# EAGLE board 13533-LilyMini_Protosnap-panel.v10 (EAGLE 7.5.0), part 1 of 2
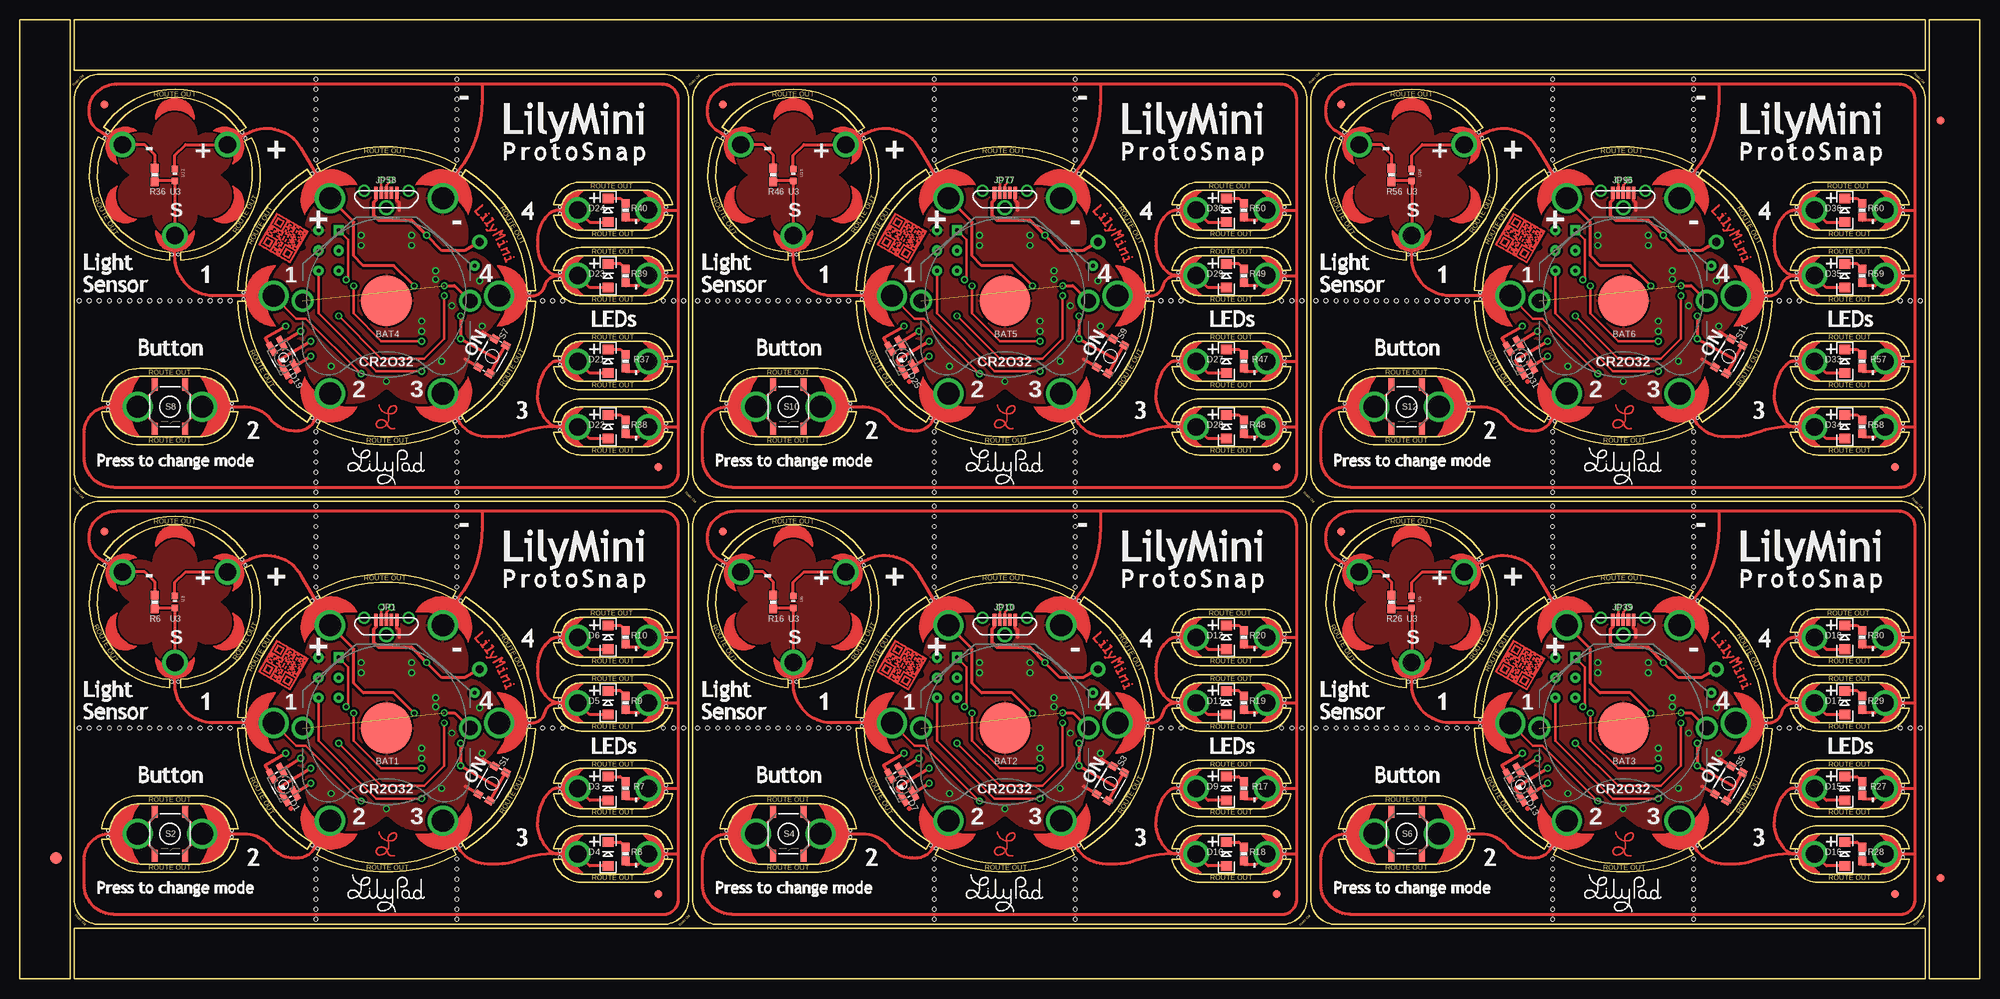
[diagram p0: board, top side]
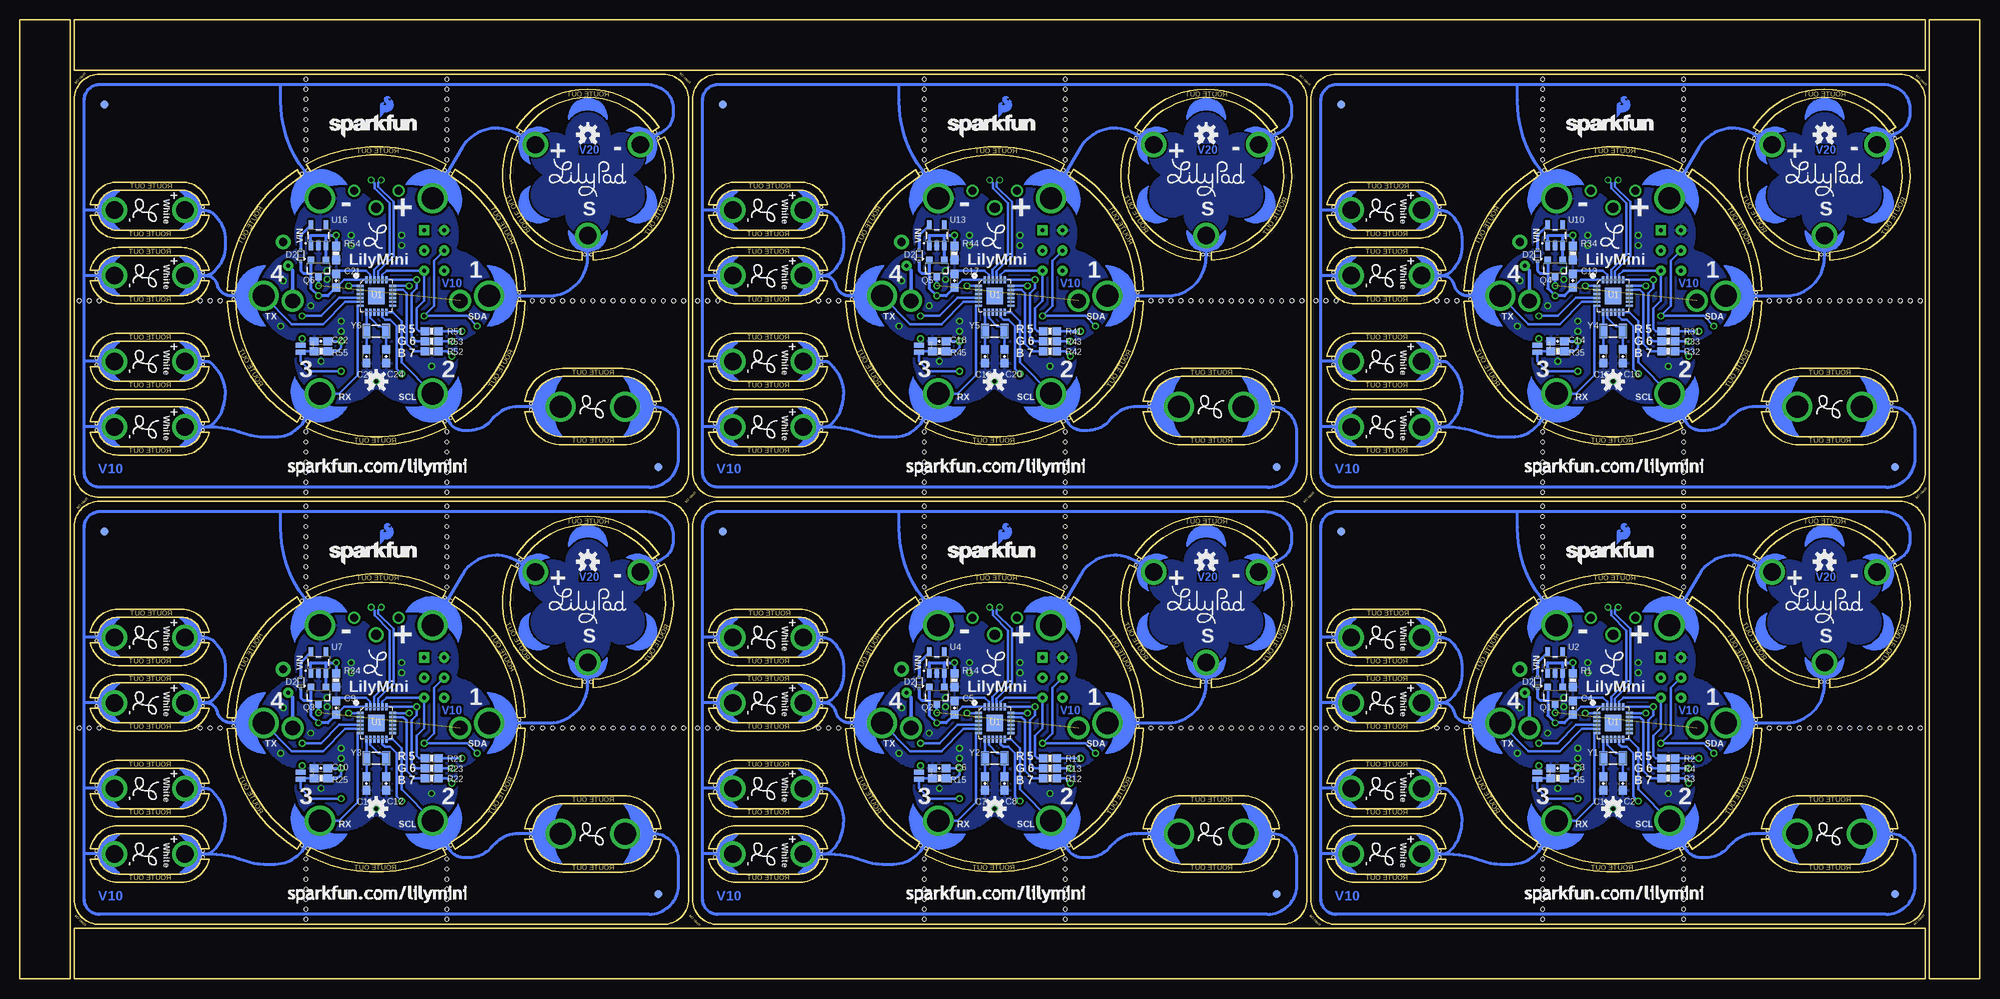
[diagram p1: board, bottom side, seen from below]

Size 247.14 x 120.9 mm. Coordinates in mm from the lower left corner, seen from the top.
Outline: 768 segments
Copper layers (1*16): Top 0.035mm / dielectric 1.5mm / Bottom 0.035mm
Design rules "SparkFun-2-layer-TIGHT *": minimum track width 7mil, minimum drill 15mil, track to track 7mil, track to pad 7mil, pad to pad 7mil, via to via 7mil, smd to smd 7mil, copper to edge 7mil, drill to drill 7mil, minimum pad ring 7mil, minimum via ring 7mil, stop-mask expansion 4mil, vias tented up to drill 25mil, thermal gap 10mil
Net classes: 1 USB: width 0.305 mm, drill 0.508 mm, clearance 0.195 mm
Holes 0.38 mm at 19.98,37.47 19.13,37.47 28.03,52.88 28.45,52.14 10.66,52.14 11.09,52.88 64.26,32.67 64.26,31.84 54.88,48.08 55.6,47.66 36.85,47.66 37.57,48.08 28.2,31.84 28.2,32.67 37.57,16.44 36.85,16.85 55.6,16.85 54.88,16.44 11.11,17.88 11.11,18.69 26.74,17.88 26.74,18.69 68.1,42.65 68.1,43.46 81.51,42.65 81.51,43.46 68.1,34.39 68.1,35.2 81.51,34.39 81.51,35.2 68.1,23.6 68.1,24.41 81.51,23.6 81.51,24.41 68.1,15.34 68.1,16.15 81.51,15.34 81.51,16.15 97.96,37.47 97.11,37.47 106.01,52.88 106.43,52.14 88.64,52.14 89.07,52.88 142.24,32.67 142.24,31.84 132.86,48.08 133.58,47.66 114.83,47.66 115.55,48.08 106.18,31.84 106.18,32.67 115.55,16.44 114.83,16.85 133.58,16.85 132.86,16.44 89.08,17.88 89.08,18.69 104.72,17.88 104.72,18.69 146.07,42.65 146.07,43.46 159.49,42.65 159.49,43.46 146.07,34.39 146.07,35.2 159.49,34.39 159.49,35.2 146.07,23.6 146.07,24.41 159.49,23.6 159.49,24.41 146.07,15.34 146.07,16.15 159.49,15.34 159.49,16.15 175.94,37.47 175.09,37.47 183.98,52.88 184.41,52.14 166.62,52.14 167.04,52.88 220.21,32.67 220.21,31.84 210.84,48.08 211.56,47.66 192.81,47.66 193.53,48.08 184.15,31.84 184.15,32.67 193.53,16.44 192.81,16.85 211.56,16.85 210.84,16.44 167.06,17.88 167.06,18.69 182.7,17.88 182.7,18.69 224.05,42.65 224.05,43.46 237.47,42.65 237.47,43.46 224.05,34.39 224.05,35.2 237.47,34.39 237.47,35.2 224.05,23.6 224.05,24.41 237.47,23.6 237.47,24.41 224.05,15.34 224.05,16.15 237.47,15.34 237.47,16.15 19.98,91.32 19.13,91.32 28.03,106.73 28.45,105.99 10.66,105.99 11.09,106.73 64.26,86.52 64.26,85.69 54.88,101.93 55.6,101.51 36.85,101.51 37.57,101.93 28.2,85.69 28.2,86.52 37.57,70.28 36.85,70.7 55.6,70.7 54.88,70.28 11.11,71.73 11.11,72.54 26.74,71.73 26.74,72.54 68.1,96.49 68.1,97.31 81.51,96.49 81.51,97.31 68.1,88.24 68.1,89.05 81.51,88.24 81.51,89.05 68.1,77.44 68.1,78.26 81.51,77.44 81.51,78.26 68.1,69.19 68.1,70 81.51,69.19 81.51,70 97.96,91.32 97.11,91.32 106.01,106.73 106.43,105.99 88.64,105.99 89.07,106.73 142.24,86.52 142.24,85.69 132.86,101.93 133.58,101.51 114.83,101.51 115.55,101.93 106.18,85.69 106.18,86.52 115.55,70.28 114.83,70.7 133.58,70.7 132.86,70.28 89.08,71.73 89.08,72.54 104.72,71.73 104.72,72.54 146.07,96.49 146.07,97.31 159.49,96.49 159.49,97.31 146.07,88.24 146.07,89.05 159.49,88.24 159.49,89.05 146.07,77.44 146.07,78.26 159.49,77.44 159.49,78.26 146.07,69.19 146.07,70 159.49,69.19 159.49,70 175.94,91.32 175.09,91.32 183.98,106.73 184.41,105.99 166.62,105.99 167.04,106.73 220.21,86.52 220.21,85.69 210.84,101.93 211.56,101.51 192.81,101.51 193.53,101.93 184.15,85.69 184.15,86.52 193.53,70.28 192.81,70.7 211.56,70.7 210.84,70.28 167.06,71.73 167.06,72.54 182.7,71.73 182.7,72.54 224.05,96.49 224.05,97.31 237.47,96.49 237.47,97.31 224.05,88.24 224.05,89.05 237.47,88.24 237.47,89.05 224.05,77.44 224.05,78.26 237.47,77.44 237.47,78.26 224.05,69.19 224.05,70 237.47,69.19 237.47,70
Holes 0.51 mm at 26.54,31.62 25.27,31.62 24,31.62 22.73,31.62 21.46,31.62 20.19,31.62 18.92,31.62 17.65,31.62 16.38,31.62 15.11,31.62 13.84,31.62 12.57,31.62 11.3,31.62 10.03,31.62 8.76,31.62 7.49,31.62 65.91,31.62 67.18,31.62 68.45,31.62 81.15,31.62 82.42,31.62 83.69,31.62 37.34,15.11 37.34,13.84 37.34,12.57 37.34,11.3 37.34,10.03 37.34,8.76 37.34,7.49 55.12,15.11 55.12,13.84 55.12,12.57 55.12,11.3 55.12,10.03 55.12,8.76 55.12,7.49 37.34,49.4 37.34,50.67 37.34,51.94 37.34,53.21 37.34,54.48 37.34,55.75 37.34,57.02 37.34,58.29 37.34,59.56 55.12,49.4 55.12,50.67 55.12,51.94 55.12,53.21 55.12,54.48 55.12,55.75 55.12,57.02 55.12,58.29 55.12,59.56 104.52,31.62 103.25,31.62 101.98,31.62 100.71,31.62 99.44,31.62 98.17,31.62 96.9,31.62 95.63,31.62 94.36,31.62 93.09,31.62 91.82,31.62 90.55,31.62 89.28,31.62 88.01,31.62 86.74,31.62 85.47,31.62 143.89,31.62 145.16,31.62 146.43,31.62 159.13,31.62 160.4,31.62 161.67,31.62 115.32,15.11 115.32,13.84 115.32,12.57 115.32,11.3 115.32,10.03 115.32,8.76 115.32,7.49 133.1,15.11 133.1,13.84 133.1,12.57 133.1,11.3 133.1,10.03 133.1,8.76 133.1,7.49 115.32,49.4 115.32,50.67 115.32,51.94 115.32,53.21 115.32,54.48 115.32,55.75 115.32,57.02 115.32,58.29 115.32,59.56 133.1,49.4 133.1,50.67 133.1,51.94 133.1,53.21 133.1,54.48 133.1,55.75 133.1,57.02 133.1,58.29 133.1,59.56 182.5,31.62 181.23,31.62 179.96,31.62 178.69,31.62 177.42,31.62 176.15,31.62 174.88,31.62 173.61,31.62 172.34,31.62 171.07,31.62 169.8,31.62 168.53,31.62 167.26,31.62 165.99,31.62 164.72,31.62 163.45,31.62 221.87,31.62 223.14,31.62 224.41,31.62 237.11,31.62 238.38,31.62 239.65,31.62 193.29,15.11 193.29,13.84 193.29,12.57 193.29,11.3 193.29,10.03 193.29,8.76 193.29,7.49 211.07,15.11 211.07,13.84 211.07,12.57 211.07,11.3 211.07,10.03 211.07,8.76 211.07,7.49 193.29,49.4 193.29,50.67 193.29,51.94 193.29,53.21 193.29,54.48 193.29,55.75 193.29,57.02 193.29,58.29 193.29,59.56 211.07,49.4 211.07,50.67 211.07,51.94 211.07,53.21 211.07,54.48 211.07,55.75 211.07,57.02 211.07,58.29 211.07,59.56 26.54,85.47 25.27,85.47 24,85.47 22.73,85.47 21.46,85.47 20.19,85.47 18.92,85.47 17.65,85.47 16.38,85.47 15.11,85.47 13.84,85.47 12.57,85.47 11.3,85.47 10.03,85.47 8.76,85.47 7.49,85.47 65.91,85.47 67.18,85.47 68.45,85.47 81.15,85.47 82.42,85.47 83.69,85.47 37.34,68.96 37.34,67.69 37.34,66.42 37.34,65.15 37.34,63.88 37.34,62.61 37.34,61.34 55.12,68.96 55.12,67.69 55.12,66.42 55.12,65.15 55.12,63.88 55.12,62.61 55.12,61.34 37.34,103.25 37.34,104.52 37.34,105.79 37.34,107.06 37.34,108.33 37.34,109.6 37.34,110.87 37.34,112.14 37.34,113.41 55.12,103.25 55.12,104.52 55.12,105.79 55.12,107.06 55.12,108.33 55.12,109.6 55.12,110.87 55.12,112.14 55.12,113.41 104.52,85.47 103.25,85.47 101.98,85.47 100.71,85.47 99.44,85.47 98.17,85.47 96.9,85.47 95.63,85.47 94.36,85.47 93.09,85.47 91.82,85.47 90.55,85.47 89.28,85.47 88.01,85.47 86.74,85.47 85.47,85.47 143.89,85.47 145.16,85.47 146.43,85.47 159.13,85.47 160.4,85.47 161.67,85.47 115.32,68.96 115.32,67.69 115.32,66.42 115.32,65.15 115.32,63.88 115.32,62.61 115.32,61.34 133.1,68.96 133.1,67.69 133.1,66.42 133.1,65.15 133.1,63.88 133.1,62.61 133.1,61.34 115.32,103.25 115.32,104.52 115.32,105.79 115.32,107.06 115.32,108.33 115.32,109.6 115.32,110.87 115.32,112.14 115.32,113.41 133.1,103.25 133.1,104.52 133.1,105.79 133.1,107.06 133.1,108.33 133.1,109.6 133.1,110.87 133.1,112.14 133.1,113.41 182.5,85.47 181.23,85.47 179.96,85.47 178.69,85.47 177.42,85.47 176.15,85.47 174.88,85.47 173.61,85.47 172.34,85.47 171.07,85.47 169.8,85.47 168.53,85.47 167.26,85.47 165.99,85.47 164.72,85.47 163.45,85.47 221.87,85.47 223.14,85.47 224.41,85.47 237.11,85.47 238.38,85.47 239.65,85.47 193.29,68.96 193.29,67.69 193.29,66.42 193.29,65.15 193.29,63.88 193.29,62.61 193.29,61.34 211.07,68.96 211.07,67.69 211.07,66.42 211.07,65.15 211.07,63.88 211.07,62.61 211.07,61.34 193.29,103.25 193.29,104.52 193.29,105.79 193.29,107.06 193.29,108.33 193.29,109.6 193.29,110.87 193.29,112.14 193.29,113.41 211.07,103.25 211.07,104.52 211.07,105.79 211.07,107.06 211.07,108.33 211.07,109.6 211.07,110.87 211.07,112.14 211.07,113.41
tRestrict: area 27.8,22.9 to 35.7,41.6; area 30,13.6 to 46.2,26.2; area 46.2,13.6 to 62.4,26.2; area 56.8,22.9 to 64.6,41.6; area 30.3,36.4 to 36.4,42.6; area 14.2,37.3 to 24.9,42.4; area 22.5,38.4 to 29.9,47.5; area 22.5,47.5 to 29.9,56.6; area 14.2,52.6 to 24.6,57.7; area 8.9,47.5 to 16.6,56.6; area 8.9,38.4 to 16.6,47.5; area 46.2,38.4 to 62.4,50.8; 66 more areas
bRestrict: area 56.8,22.9 to 64.6,41.6; area 46.2,13.6 to 62.4,26.2; area 30,13.6 to 46.2,26.2; area 27.8,22.9 to 35.7,41.6; area 46.9,34.5 to 50.7,35.6; area 14.2,37.3 to 24.9,42.4; area 22.5,38.4 to 29.9,47.5; area 22.5,47.5 to 29.9,56.6; area 14.2,52.6 to 24.6,57.7; area 8.9,47.5 to 16.6,56.6; area 8.9,38.4 to 16.6,47.5; area 46.2,38.4 to 62.4,50.9; 66 more areas

## Footprints (pad centres in the part's own frame; a part is rotated, then mirrored left to right if it is on the bottom)
BATTERY_20MM_PTH_KIT = drill 1.854: +1 -10.554,0; +2 10.554,0 | smd 6.35 x 6.35: -3 0,0
0603-CAP = smd 1.1 x 1: 1 -0.85,0; 2 0.85,0
P-LCC-4-3 = smd 0.75 x 1.8: 1 0.725,1.7; 2 -0.725,1.7; 3 -0.725,-1.7; 4 0.725,-1.7
SOD-523 = smd 0.4 x 0.4: A -0.7,0; C 0.7,0
LED-1206 = smd 1.2 x 1.4: A -1.5,0; C 1.5,0
FIDUCIAL-1.5X3 = smd 1.5 x 1.5: 1 0,0
FIDUCIAL-1X2 = smd 1 x 1: 1 0,0
USB-B-MICRO-SMD_VERT = smd 0.45 x 1.5: D+ 0,0; D- -0.65,0; GND 1.3,0; ID 0.65,0; VBUS -1.3,0 | drill 1.016: P1 -2.8,0.25; P2 2.8,0.25 | drill 1.27: P3 0,-1.9
1X01NS = drill 1.016 pad 1.88: 1 0,0
1X01_POGOPIN_PAD_NOSILK_1SIDE_SQUARE = drill 0.508 pad 1.27 square: P$1 0,0
1X01_POGOPIN_PAD_NOSILK_1SIDE_ROUND = drill 0.508 pad 1.27: P$1 0,0
PETAL-MEDIUM-2SIDE = drill 2.794: 1 0,-0.254
PETAL-SMALL-2SIDE = drill 2.2: 1 0,0
SOT23-3 = smd 0.8 x 0.9: 1 -0.95,-1; 2 0.95,-1; 3 0,1.1
0603-RES = smd 1.1 x 1: 1 -0.85,0; 2 0.85,0
TACTILE_SWITCH_SMD_4.6X2.8MM = smd 0.9 x 1: 1 -2.05,-0.8; 2 2.05,-0.8; 3 2.05,0.8; 4 -2.05,0.8
TACTILE-SWITCH-SMD = smd 1.524 x 0.762: 1 -2.794,1.905; 2 2.794,1.905; 3 -2.794,-1.905; 4 2.794,-1.905
PAD-JUMPER-2-NO_NO_SILK = smd 0.635 x 1.27: 1 -0.45,0; 2 0.45,0
QFN-24_ALT2 = smd 0.9 x 0.3: 1 -2.05,1.25; 2 -2.05,0.75; 3 -2.05,0.25; 4 -2.05,-0.25; 5 -2.05,-0.75; 6 -2.05,-1.25; 13 2.05,-1.25; 14 2.05,-0.75; 15 2.05,-0.25; 16 2.05,0.25; 17 2.05,0.75; 18 2.05,1.25 | smd 0.3 x 0.9: 7 -1.25,-2.05; 8 -0.75,-2.05; 9 -0.25,-2.05; 10 0.25,-2.05; 11 0.75,-2.05; 12 1.25,-2.05; 19 1.25,2.05; 20 0.75,2.05; 21 0.25,2.05; 22 -0.25,2.05; 23 -0.75,2.05; 24 -1.25,2.05 | smd 2.1 x 2.1: EP 0,0
SOT23-5 = smd 0.55 x 1.2: 1 -0.95,-1.3; 2 0,-1.3; 3 0.95,-1.3; 4 0.95,1.3; 5 -0.95,1.3
ALS-PT19 = smd 0.8 x 0.8: C -0.75,0; E 0.75,0
CRYSTAL-SMD-3.2X1.5MM = smd 1 x 1.8: P$1 -1.25,0; P$2 1.25,0

## Placement (x,y rotation side)
$1_61_$_2016-09-25_21-56-01  OSHW-LOGOS  [OSHW-LOGO-S]  124.21,21.46 0 bottom
$1_61_$_2016-09-25_21-56-02  OSHW-LOGOS  [OSHW-LOGO-S]  202.18,21.46 0 bottom
$1_61_$_2016-09-25_21-56-03  OSHW-LOGOS  [OSHW-LOGO-S]  46.23,75.31 0 bottom
$1_61_$_2016-09-25_21-56-04  OSHW-LOGOS  [OSHW-LOGO-S]  124.21,75.31 0 bottom
$1_61_$_2016-09-25_21-56-05  OSHW-LOGOS  [OSHW-LOGO-S]  202.18,75.31 0 bottom
$1_61_$_2016-09-25_21-56-09  OSHW-LOGOS  [OSHW-LOGO-S]  46.23,21.46 0 bottom
BAT1  CR2032  [BATTERY_20MM_PTH_KIT]  46.23,31.62 180 top
BAT2  CR2032  [BATTERY_20MM_PTH_KIT]  124.21,31.62 180 top
BAT3  CR2032  [BATTERY_20MM_PTH_KIT]  202.18,31.62 180 top
BAT4  CR2032  [BATTERY_20MM_PTH_KIT]  46.23,85.47 180 top
BAT5  CR2032  [BATTERY_20MM_PTH_KIT]  124.21,85.47 180 top
BAT6  CR2032  [BATTERY_20MM_PTH_KIT]  202.18,85.47 180 top
C1  15pF  [0603-CAP]  47.48,24.64 90 bottom
C2  15pF  [0603-CAP]  44.98,24.64 90 bottom
C3  0.1uF  [0603-CAP]  53.21,26.54 180 bottom
C4  0.1uF  [0603-CAP]  51.31,34.16 90 bottom
C5  0.1uF  [0603-CAP]  129.29,34.16 90 bottom
C6  0.1uF  [0603-CAP]  131.19,26.54 180 bottom
C7  15pF  [0603-CAP]  125.46,24.64 90 bottom
C8  15pF  [0603-CAP]  122.96,24.64 90 bottom
C9  0.1uF  [0603-CAP]  207.26,34.16 90 bottom
C10  0.1uF  [0603-CAP]  209.17,26.54 180 bottom
C11  15pF  [0603-CAP]  203.43,24.64 90 bottom
C12  15pF  [0603-CAP]  200.93,24.64 90 bottom
C13  0.1uF  [0603-CAP]  51.31,88.01 90 bottom
C14  0.1uF  [0603-CAP]  53.21,80.39 180 bottom
C15  15pF  [0603-CAP]  47.48,78.49 90 bottom
C16  15pF  [0603-CAP]  44.98,78.49 90 bottom
C17  0.1uF  [0603-CAP]  129.29,88.01 90 bottom
C18  0.1uF  [0603-CAP]  131.19,80.39 180 bottom
C19  15pF  [0603-CAP]  125.46,78.49 90 bottom
C20  15pF  [0603-CAP]  122.96,78.49 90 bottom
C21  0.1uF  [0603-CAP]  207.26,88.01 90 bottom
C22  0.1uF  [0603-CAP]  209.17,80.39 180 bottom
C23  15pF  [0603-CAP]  203.43,78.49 90 bottom
C24  15pF  [0603-CAP]  200.93,78.49 90 bottom
D1  [P-LCC-4-3]  33.25,24.48 210 top
D2  RB751  [SOD-523]  55.75,37.34 270 bottom
D3  [LED-1206]  74.17,24 90 top
D4  [LED-1206]  74.17,15.75 90 top
D5  [LED-1206]  74.17,34.8 90 top
D6  [LED-1206]  74.17,43.05 90 top
D7  [P-LCC-4-3]  111.23,24.48 210 top
D8  RB751  [SOD-523]  133.73,37.34 270 bottom
D9  [LED-1206]  152.15,24 90 top
D10  [LED-1206]  152.15,15.75 90 top
D11  [LED-1206]  152.15,34.8 90 top
D12  [LED-1206]  152.15,43.05 90 top
D13  [P-LCC-4-3]  189.21,24.48 210 top
D14  RB751  [SOD-523]  211.71,37.34 270 bottom
D15  [LED-1206]  230.12,24 90 top
D16  [LED-1206]  230.12,15.75 90 top
D17  [LED-1206]  230.12,34.8 90 top
D18  [LED-1206]  230.12,43.05 90 top
D19  [P-LCC-4-3]  33.25,78.33 210 top
D20  RB751  [SOD-523]  55.75,91.19 270 bottom
D21  [LED-1206]  74.17,77.85 90 top
D22  [LED-1206]  74.17,69.6 90 top
D23  [LED-1206]  74.17,88.65 90 top
D24  [LED-1206]  74.17,96.9 90 top
D25  [P-LCC-4-3]  111.23,78.33 210 top
D26  RB751  [SOD-523]  133.73,91.19 270 bottom
D27  [LED-1206]  152.15,77.85 90 top
D28  [LED-1206]  152.15,69.6 90 top
D29  [LED-1206]  152.15,88.65 90 top
D30  [LED-1206]  152.15,96.9 90 top
D31  [P-LCC-4-3]  189.21,78.33 210 top
D32  RB751  [SOD-523]  211.71,91.19 270 bottom
D33  [LED-1206]  230.12,77.85 90 top
D34  [LED-1206]  230.12,69.6 90 top
D35  [LED-1206]  230.12,88.65 90 top
D36  [LED-1206]  230.12,96.9 90 top
E$1  [FIDUCIAL-1.5X3]  4.57,15.24 0 top
E$7  [FIDUCIAL-1X2]  242.19,108.2 180 top
E$8  [FIDUCIAL-1X2]  242.19,12.7 0 top
FD1  FIDUCIAL1X2  [FIDUCIAL-1X2]  10.67,56.39 0 top
FD2  FIDUCIAL1X2  [FIDUCIAL-1X2]  80.52,10.67 0 top
FD3  FIDUCIAL1X2  [FIDUCIAL-1X2]  80.52,56.39 0 bottom
FD4  FIDUCIAL1X2  [FIDUCIAL-1X2]  10.67,10.67 0 bottom
FD5  FIDUCIAL1X2  [FIDUCIAL-1X2]  158.5,10.67 0 top
FD6  FIDUCIAL1X2  [FIDUCIAL-1X2]  88.65,56.39 0 top
FD7  FIDUCIAL1X2  [FIDUCIAL-1X2]  158.5,56.39 0 bottom
FD8  FIDUCIAL1X2  [FIDUCIAL-1X2]  88.65,10.67 0 bottom
FD9  FIDUCIAL1X2  [FIDUCIAL-1X2]  236.47,10.67 0 top
FD10  FIDUCIAL1X2  [FIDUCIAL-1X2]  166.62,56.39 0 top
FD11  FIDUCIAL1X2  [FIDUCIAL-1X2]  236.47,56.39 0 bottom
FD12  FIDUCIAL1X2  [FIDUCIAL-1X2]  166.62,10.67 0 bottom
FD13  FIDUCIAL1X2  [FIDUCIAL-1X2]  80.52,64.52 0 top
FD14  FIDUCIAL1X2  [FIDUCIAL-1X2]  10.67,110.24 0 top
FD15  FIDUCIAL1X2  [FIDUCIAL-1X2]  80.52,110.24 0 bottom
FD16  FIDUCIAL1X2  [FIDUCIAL-1X2]  10.67,64.52 0 bottom
FD17  FIDUCIAL1X2  [FIDUCIAL-1X2]  158.5,64.52 0 top
FD18  FIDUCIAL1X2  [FIDUCIAL-1X2]  88.65,110.24 0 top
FD19  FIDUCIAL1X2  [FIDUCIAL-1X2]  158.5,110.24 0 bottom
FD20  FIDUCIAL1X2  [FIDUCIAL-1X2]  88.65,64.52 0 bottom
FD21  FIDUCIAL1X2  [FIDUCIAL-1X2]  236.47,64.52 0 top
FD22  FIDUCIAL1X2  [FIDUCIAL-1X2]  166.62,110.24 0 top
FD23  FIDUCIAL1X2  [FIDUCIAL-1X2]  236.47,110.24 0 bottom
FD24  FIDUCIAL1X2  [FIDUCIAL-1X2]  166.62,64.52 0 bottom
JP1  [USB-B-MICRO-SMD_VERT]  46.23,45.28 0 top
JP2  [1X01NS]  57.98,39.05 0 top
JP3  [1X01_POGOPIN_PAD_NOSILK_1SIDE_SQUARE]  40.2,40.51 0 bottom
JP4  [1X01_POGOPIN_PAD_NOSILK_1SIDE_ROUND]  37.66,40.51 0 bottom
JP5  [1X01_POGOPIN_PAD_NOSILK_1SIDE_ROUND]  40.2,37.97 0 bottom
JP6  [1X01_POGOPIN_PAD_NOSILK_1SIDE_ROUND]  37.66,37.97 0 bottom
JP7  [1X01_POGOPIN_PAD_NOSILK_1SIDE_ROUND]  40.2,35.43 0 bottom
JP8  [1X01_POGOPIN_PAD_NOSILK_1SIDE_ROUND]  37.66,35.43 0 bottom
JP9  [1X01_POGOPIN_PAD_NOSILK_1SIDE_ROUND]  57.34,36.07 0 bottom
JP10  [USB-B-MICRO-SMD_VERT]  124.21,45.28 0 top
JP11  [1X01_POGOPIN_PAD_NOSILK_1SIDE_SQUARE]  118.17,40.51 0 bottom
JP12  [PETAL-MEDIUM-2SIDE]  22.73,18.29 90 top
JP13  [PETAL-MEDIUM-2SIDE]  15.11,18.29 270 top
JP14  [1X01_POGOPIN_PAD_NOSILK_1SIDE_ROUND]  115.63,40.51 0 bottom
JP15  [1X01_POGOPIN_PAD_NOSILK_1SIDE_ROUND]  118.17,37.97 0 bottom
JP16  [1X01_POGOPIN_PAD_NOSILK_1SIDE_ROUND]  115.63,37.97 0 bottom
JP17  [1X01_POGOPIN_PAD_NOSILK_1SIDE_ROUND]  118.17,35.43 0 bottom
JP18  [1X01_POGOPIN_PAD_NOSILK_1SIDE_ROUND]  115.63,35.43 0 bottom
JP19  [1X01NS]  135.95,39.05 0 top
JP20  [PETAL-SMALL-2SIDE]  70.36,24 270 top
JP21  [PETAL-SMALL-2SIDE]  79.25,24 90 top
JP22  [PETAL-SMALL-2SIDE]  70.36,15.75 270 top
JP23  [PETAL-SMALL-2SIDE]  79.25,15.75 90 top
JP24  [PETAL-SMALL-2SIDE]  70.36,43.05 270 top
JP25  [PETAL-SMALL-2SIDE]  79.25,34.8 90 top
JP26  [PETAL-SMALL-2SIDE]  70.36,34.8 270 top
JP27  [PETAL-SMALL-2SIDE]  79.25,43.05 90 top
JP28  [PETAL-SMALL-2SIDE]  157.23,24 90 top
JP29  [PETAL-SMALL-2SIDE]  157.23,15.75 90 top
JP30  [PETAL-SMALL-2SIDE]  157.23,34.8 90 top
JP31  [PETAL-SMALL-2SIDE]  157.23,43.05 90 top
JP32  [PETAL-MEDIUM-2SIDE]  93.09,18.29 270 top
JP33  [PETAL-MEDIUM-2SIDE]  100.71,18.29 90 top
JP34  [PETAL-SMALL-2SIDE]  148.34,24 270 top
JP35  [PETAL-SMALL-2SIDE]  148.34,15.75 270 top
JP36  [PETAL-SMALL-2SIDE]  148.34,43.05 270 top
JP37  [PETAL-SMALL-2SIDE]  148.34,34.8 270 top
JP38  [1X01_POGOPIN_PAD_NOSILK_1SIDE_ROUND]  135.32,36.07 0 bottom
JP39  [USB-B-MICRO-SMD_VERT]  202.18,45.28 0 top
JP40  [1X01_POGOPIN_PAD_NOSILK_1SIDE_SQUARE]  196.15,40.51 0 bottom
JP41  [1X01_POGOPIN_PAD_NOSILK_1SIDE_ROUND]  193.61,40.51 0 bottom
JP42  [1X01_POGOPIN_PAD_NOSILK_1SIDE_ROUND]  196.15,37.97 0 bottom
JP43  [1X01_POGOPIN_PAD_NOSILK_1SIDE_ROUND]  193.61,37.97 0 bottom
JP44  [1X01_POGOPIN_PAD_NOSILK_1SIDE_ROUND]  196.15,35.43 0 bottom
JP45  [1X01_POGOPIN_PAD_NOSILK_1SIDE_ROUND]  193.61,35.43 0 bottom
JP46  [1X01NS]  213.93,39.05 0 top
JP47  [PETAL-SMALL-2SIDE]  235.2,24 90 top
JP48  [PETAL-SMALL-2SIDE]  235.2,15.75 90 top
JP49  [PETAL-SMALL-2SIDE]  235.2,34.8 90 top
JP50  [PETAL-SMALL-2SIDE]  235.2,43.05 90 top
JP51  [PETAL-MEDIUM-2SIDE]  171.07,18.29 270 top
JP52  [PETAL-MEDIUM-2SIDE]  178.69,18.29 90 top
JP53  [PETAL-SMALL-2SIDE]  226.31,24 270 top
JP54  [PETAL-SMALL-2SIDE]  226.31,15.75 270 top
JP55  [PETAL-SMALL-2SIDE]  226.31,43.05 270 top
JP56  [PETAL-SMALL-2SIDE]  226.31,34.8 270 top
JP57  [1X01_POGOPIN_PAD_NOSILK_1SIDE_ROUND]  213.3,36.07 0 bottom
JP58  [USB-B-MICRO-SMD_VERT]  46.23,99.12 0 top
JP59  [1X01_POGOPIN_PAD_NOSILK_1SIDE_SQUARE]  40.2,94.36 0 bottom
JP60  [1X01_POGOPIN_PAD_NOSILK_1SIDE_ROUND]  37.66,94.36 0 bottom
JP61  [1X01_POGOPIN_PAD_NOSILK_1SIDE_ROUND]  40.2,91.82 0 bottom
JP62  [1X01_POGOPIN_PAD_NOSILK_1SIDE_ROUND]  37.66,91.82 0 bottom
JP63  [1X01_POGOPIN_PAD_NOSILK_1SIDE_ROUND]  40.2,89.28 0 bottom
JP64  [1X01_POGOPIN_PAD_NOSILK_1SIDE_ROUND]  37.66,89.28 0 bottom
JP65  [1X01NS]  57.98,92.9 0 top
JP66  [PETAL-SMALL-2SIDE]  79.25,77.85 90 top
JP67  [PETAL-SMALL-2SIDE]  79.25,69.6 90 top
JP68  [PETAL-SMALL-2SIDE]  79.25,88.65 90 top
JP69  [PETAL-SMALL-2SIDE]  79.25,96.9 90 top
JP70  [PETAL-MEDIUM-2SIDE]  15.11,72.14 270 top
JP71  [PETAL-MEDIUM-2SIDE]  22.73,72.14 90 top
JP72  [PETAL-SMALL-2SIDE]  70.36,77.85 270 top
JP73  [PETAL-SMALL-2SIDE]  70.36,69.6 270 top
JP74  [PETAL-SMALL-2SIDE]  70.36,96.9 270 top
JP75  [PETAL-SMALL-2SIDE]  70.36,88.65 270 top
JP76  [1X01_POGOPIN_PAD_NOSILK_1SIDE_ROUND]  57.34,89.92 0 bottom
JP77  [USB-B-MICRO-SMD_VERT]  124.21,99.12 0 top
JP78  [1X01_POGOPIN_PAD_NOSILK_1SIDE_SQUARE]  118.17,94.36 0 bottom
JP79  [1X01_POGOPIN_PAD_NOSILK_1SIDE_ROUND]  115.63,94.36 0 bottom
JP80  [1X01_POGOPIN_PAD_NOSILK_1SIDE_ROUND]  118.17,91.82 0 bottom
JP81  [1X01_POGOPIN_PAD_NOSILK_1SIDE_ROUND]  115.63,91.82 0 bottom
JP82  [1X01_POGOPIN_PAD_NOSILK_1SIDE_ROUND]  118.17,89.28 0 bottom
JP83  [1X01_POGOPIN_PAD_NOSILK_1SIDE_ROUND]  115.63,89.28 0 bottom
JP84  [1X01NS]  135.95,92.9 0 top
JP85  [PETAL-SMALL-2SIDE]  157.23,77.85 90 top
JP86  [PETAL-SMALL-2SIDE]  157.23,69.6 90 top
JP87  [PETAL-SMALL-2SIDE]  157.23,88.65 90 top
JP88  [PETAL-SMALL-2SIDE]  157.23,96.9 90 top
JP89  [PETAL-MEDIUM-2SIDE]  93.09,72.14 270 top
JP90  [PETAL-MEDIUM-2SIDE]  100.71,72.14 90 top
JP91  [PETAL-SMALL-2SIDE]  148.34,77.85 270 top
JP92  [PETAL-SMALL-2SIDE]  148.34,69.6 270 top
JP93  [PETAL-SMALL-2SIDE]  148.34,96.9 270 top
JP94  [PETAL-SMALL-2SIDE]  148.34,88.65 270 top
JP95  [1X01_POGOPIN_PAD_NOSILK_1SIDE_ROUND]  135.32,89.92 0 bottom
JP96  [USB-B-MICRO-SMD_VERT]  202.18,99.12 0 top
JP97  [1X01_POGOPIN_PAD_NOSILK_1SIDE_SQUARE]  196.15,94.36 0 bottom
JP98  [1X01_POGOPIN_PAD_NOSILK_1SIDE_ROUND]  193.61,94.36 0 bottom
JP99  [1X01_POGOPIN_PAD_NOSILK_1SIDE_ROUND]  196.15,91.82 0 bottom
JP100  [1X01_POGOPIN_PAD_NOSILK_1SIDE_ROUND]  193.61,91.82 0 bottom
JP101  [1X01_POGOPIN_PAD_NOSILK_1SIDE_ROUND]  196.15,89.28 0 bottom
JP102  [1X01_POGOPIN_PAD_NOSILK_1SIDE_ROUND]  193.61,89.28 0 bottom
JP103  [1X01NS]  213.93,92.9 0 top
JP104  [PETAL-SMALL-2SIDE]  235.2,77.85 90 top
JP105  [PETAL-SMALL-2SIDE]  235.2,69.6 90 top
JP106  [PETAL-SMALL-2SIDE]  235.2,88.65 90 top
JP107  [PETAL-SMALL-2SIDE]  235.2,96.9 90 top
JP108  [PETAL-MEDIUM-2SIDE]  171.07,72.14 270 top
JP109  [PETAL-MEDIUM-2SIDE]  178.69,72.14 90 top
JP110  [PETAL-SMALL-2SIDE]  226.31,77.85 270 top
JP111  [PETAL-SMALL-2SIDE]  226.31,69.6 270 top
JP112  [PETAL-SMALL-2SIDE]  226.31,96.9 270 top
JP113  [PETAL-SMALL-2SIDE]  226.31,88.65 270 top
JP114  [1X01_POGOPIN_PAD_NOSILK_1SIDE_ROUND]  213.3,89.92 0 bottom
LOGO1  [LOGO-L]  46.39,39.88 0 bottom
LOGO2  [LOGO-L-TOP]  46.23,17.02 6 top
LOGO3  OSHW-LOGOS  [OSHW-LOGO-S]  19.56,52.58 0 bottom
LOGO4  SFE_LOGO_NAME.1_INCH  [SFE_LOGO_NAME_.1]  52.58,51.78 0 bottom
LOGO5  [LOGO-L]  124.36,39.88 0 bottom
LOGO6  [LOGO-L-TOP]  124.21,17.02 6 top
LOGO7  OSHW-LOGOS  [OSHW-LOGO-S]  97.54,52.58 0 bottom
LOGO8  SFE_LOGO_NAME.1_INCH  [SFE_LOGO_NAME_.1]  130.56,51.78 0 bottom
LOGO9  [LOGO-L]  202.34,39.88 0 bottom
LOGO10  [LOGO-L-TOP]  202.18,17.02 6 top
LOGO11  OSHW-LOGOS  [OSHW-LOGO-S]  175.51,52.58 0 bottom
LOGO12  SFE_LOGO_NAME.1_INCH  [SFE_LOGO_NAME_.1]  208.53,51.78 0 bottom
LOGO13  [LOGO-L]  46.39,93.73 0 bottom
LOGO14  [LOGO-L-TOP]  46.23,70.87 6 top
LOGO15  OSHW-LOGOS  [OSHW-LOGO-S]  19.56,106.43 0 bottom
LOGO16  SFE_LOGO_NAME.1_INCH  [SFE_LOGO_NAME_.1]  52.58,105.63 0 bottom
LOGO17  [LOGO-L]  124.36,93.73 0 bottom
LOGO18  [LOGO-L-TOP]  124.21,70.87 6 top
LOGO19  OSHW-LOGOS  [OSHW-LOGO-S]  97.54,106.43 0 bottom
LOGO20  SFE_LOGO_NAME.1_INCH  [SFE_LOGO_NAME_.1]  130.56,105.63 0 bottom
LOGO21  [LOGO-L]  202.34,93.73 0 bottom
LOGO22  [LOGO-L-TOP]  202.18,70.87 6 top
LOGO23  OSHW-LOGOS  [OSHW-LOGO-S]  175.51,106.43 0 bottom
LOGO24  SFE_LOGO_NAME.1_INCH  [SFE_LOGO_NAME_.1]  208.53,105.63 0 bottom
Q1  ZXMP6A13F  [SOT23-3]  53.53,35.75 180 bottom
Q2  ZXMP6A13F  [SOT23-3]  131.51,35.75 180 bottom
Q3  ZXMP6A13F  [SOT23-3]  209.49,35.75 180 bottom
Q4  ZXMP6A13F  [SOT23-3]  53.53,89.6 180 bottom
Q5  ZXMP6A13F  [SOT23-3]  131.51,89.6 180 bottom
Q6  ZXMP6A13F  [SOT23-3]  209.49,89.6 180 bottom
R1  10K  [0603-RES]  51.31,37.66 90 bottom
R2  330  [0603-RES]  39.24,27.81 0 bottom
R3  2K  [0603-RES]  39.24,25.27 0 bottom
R4  1K  [0603-RES]  39.24,26.54 0 bottom
R5  330  [0603-RES]  53.21,25.27 180 bottom
R6  10K  [0603-RES]  17.02,47.5 270 top
R7  150  [0603-RES]  76.39,24 90 top
R8  150  [0603-RES]  76.39,15.75 90 top
R9  150  [0603-RES]  76.39,34.8 90 top
R10  150  [0603-RES]  76.39,43.05 90 top
R11  330  [0603-RES]  117.22,27.81 0 bottom
R12  2K  [0603-RES]  117.22,25.27 0 bottom
R13  1K  [0603-RES]  117.22,26.54 0 bottom
R14  10K  [0603-RES]  129.29,37.66 90 bottom
R15  330  [0603-RES]  131.19,25.27 180 bottom
R16  10K  [0603-RES]  95,47.5 270 top
R17  150  [0603-RES]  154.37,24 90 top
R18  150  [0603-RES]  154.37,15.75 90 top
R19  150  [0603-RES]  154.37,34.8 90 top
R20  150  [0603-RES]  154.37,43.05 90 top
R21  330  [0603-RES]  195.2,27.81 0 bottom
R22  2K  [0603-RES]  195.2,25.27 0 bottom
R23  1K  [0603-RES]  195.2,26.54 0 bottom
R24  10K  [0603-RES]  207.26,37.66 90 bottom
R25  330  [0603-RES]  209.17,25.27 180 bottom
R26  10K  [0603-RES]  172.97,47.5 270 top
R27  150  [0603-RES]  232.35,24 90 top
R28  150  [0603-RES]  232.35,15.75 90 top
R29  150  [0603-RES]  232.35,34.8 90 top
R30  150  [0603-RES]  232.35,43.05 90 top
R31  330  [0603-RES]  39.24,81.66 0 bottom
R32  2K  [0603-RES]  39.24,79.12 0 bottom
R33  1K  [0603-RES]  39.24,80.39 0 bottom
R34  10K  [0603-RES]  51.31,91.5 90 bottom
R35  330  [0603-RES]  53.21,79.12 180 bottom
R36  10K  [0603-RES]  17.02,101.35 270 top
R37  150  [0603-RES]  76.39,77.85 90 top
R38  150  [0603-RES]  76.39,69.6 90 top
R39  150  [0603-RES]  76.39,88.65 90 top
R40  150  [0603-RES]  76.39,96.9 90 top
R41  330  [0603-RES]  117.22,81.66 0 bottom
R42  2K  [0603-RES]  117.22,79.12 0 bottom
R43  1K  [0603-RES]  117.22,80.39 0 bottom
R44  10K  [0603-RES]  129.29,91.5 90 bottom
R45  330  [0603-RES]  131.19,79.12 180 bottom
R46  10K  [0603-RES]  95,101.35 270 top
R47  150  [0603-RES]  154.37,77.85 90 top
R48  150  [0603-RES]  154.37,69.6 90 top
R49  150  [0603-RES]  154.37,88.65 90 top
R50  150  [0603-RES]  154.37,96.9 90 top
R51  330  [0603-RES]  195.2,81.66 0 bottom
R52  2K  [0603-RES]  195.2,79.12 0 bottom
R53  1K  [0603-RES]  195.2,80.39 0 bottom
R54  10K  [0603-RES]  207.26,91.5 90 bottom
R55  330  [0603-RES]  209.17,79.12 180 bottom
R56  10K  [0603-RES]  172.97,101.35 270 top
R57  150  [0603-RES]  232.35,77.85 90 top
R58  150  [0603-RES]  232.35,69.6 90 top
R59  150  [0603-RES]  232.35,88.65 90 top
R60  150  [0603-RES]  232.35,96.9 90 top
S1  [TACTILE_SWITCH_SMD_4.6X2.8MM]  59.56,24.64 60 top
S2  [TACTILE-SWITCH-SMD]  18.92,18.29 270 top
S3  [TACTILE_SWITCH_SMD_4.6X2.8MM]  137.54,24.64 60 top
S4  [TACTILE-SWITCH-SMD]  96.9,18.29 270 top
S5  [TACTILE_SWITCH_SMD_4.6X2.8MM]  215.52,24.64 60 top
S6  [TACTILE-SWITCH-SMD]  174.88,18.29 270 top
S7  [TACTILE_SWITCH_SMD_4.6X2.8MM]  59.56,78.49 60 top
S8  [TACTILE-SWITCH-SMD]  18.92,72.14 270 top
S9  [TACTILE_SWITCH_SMD_4.6X2.8MM]  137.54,78.49 60 top
S10  [TACTILE-SWITCH-SMD]  96.9,72.14 270 top
S11  [TACTILE_SWITCH_SMD_4.6X2.8MM]  215.52,78.49 60 top
S12  [TACTILE-SWITCH-SMD]  174.88,72.14 270 top
SEWTAP1  [PETAL-MEDIUM-2SIDE]  32.26,32.26 270 top
SEWTAP2  [PETAL-MEDIUM-2SIDE]  39.24,20.16 330 top
SEWTAP3  [PETAL-MEDIUM-2SIDE]  53.21,20.16 30 top
SEWTAP4  [PETAL-MEDIUM-2SIDE]  60.2,32.26 90 top
SEWTAP5  [PETAL-MEDIUM-2SIDE]  110.24,32.26 270 top
SEWTAP6  [PETAL-MEDIUM-2SIDE]  117.22,20.16 330 top
SEWTAP7  [PETAL-MEDIUM-2SIDE]  131.19,20.16 30 top
SEWTAP8  [PETAL-MEDIUM-2SIDE]  138.18,32.26 90 top
SEWTAP9  [PETAL-MEDIUM-2SIDE]  188.21,32.26 270 top
SEWTAP10  [PETAL-MEDIUM-2SIDE]  195.2,20.16 330 top
SEWTAP11  [PETAL-MEDIUM-2SIDE]  209.17,20.16 30 top
SEWTAP12  [PETAL-MEDIUM-2SIDE]  216.15,32.26 90 top
SEWTAP13  [PETAL-MEDIUM-2SIDE]  32.26,86.11 270 top
SEWTAP14  [PETAL-MEDIUM-2SIDE]  39.24,74.01 330 top
SEWTAP15  [PETAL-MEDIUM-2SIDE]  53.21,74.01 30 top
SEWTAP16  [PETAL-MEDIUM-2SIDE]  60.2,86.11 90 top
SEWTAP17  [PETAL-MEDIUM-2SIDE]  110.24,86.11 270 top
SEWTAP18  [PETAL-MEDIUM-2SIDE]  117.22,74.01 330 top
SEWTAP19  [PETAL-MEDIUM-2SIDE]  131.19,74.01 30 top
SEWTAP20  [PETAL-MEDIUM-2SIDE]  138.18,86.11 90 top
SEWTAP21  [PETAL-MEDIUM-2SIDE]  188.21,86.11 270 top
SEWTAP22  [PETAL-MEDIUM-2SIDE]  195.2,74.01 330 top
SEWTAP23  [PETAL-MEDIUM-2SIDE]  209.17,74.01 30 top
SEWTAP24  [PETAL-MEDIUM-2SIDE]  216.15,86.11 90 top
SEWTAP+  [PETAL-MEDIUM-2SIDE]  39.24,44.36 210 top
SEWTAP+1  [PETAL-MEDIUM-2SIDE]  117.22,44.36 210 top
SEWTAP+2  [PETAL-MEDIUM-2SIDE]  195.2,44.36 210 top
SEWTAP+3  [PETAL-MEDIUM-2SIDE]  39.24,98.2 210 top
SEWTAP+4  [PETAL-MEDIUM-2SIDE]  117.22,98.2 210 top
SEWTAP+5  [PETAL-MEDIUM-2SIDE]  195.2,98.2 210 top
SEWTAP-  [PETAL-MEDIUM-2SIDE]  53.21,44.36 150 top
SEWTAP-1  [PETAL-MEDIUM-2SIDE]  131.19,44.36 150 top
SEWTAP-2  [PETAL-MEDIUM-2SIDE]  209.17,44.36 150 top
SEWTAP-3  [PETAL-MEDIUM-2SIDE]  53.21,98.2 150 top
SEWTAP-4  [PETAL-MEDIUM-2SIDE]  131.19,98.2 150 top
SEWTAP-5  [PETAL-MEDIUM-2SIDE]  209.17,98.2 150 top
SEWTAPLS+  PLUS  [PETAL-SMALL-2SIDE]  26.16,51.31 120 top
SEWTAPLS+1  PLUS  [PETAL-SMALL-2SIDE]  104.14,51.31 120 top
SEWTAPLS+2  PLUS  [PETAL-SMALL-2SIDE]  182.11,51.31 120 top
SEWTAPLS+3  PLUS  [PETAL-SMALL-2SIDE]  26.16,105.16 120 top
SEWTAPLS+4  PLUS  [PETAL-SMALL-2SIDE]  104.14,105.16 120 top
SEWTAPLS+5  PLUS  [PETAL-SMALL-2SIDE]  182.11,105.16 120 top
SEWTAPLS-  MINUS  [PETAL-SMALL-2SIDE]  12.96,51.31 240 top
SEWTAPLS-1  MINUS  [PETAL-SMALL-2SIDE]  90.94,51.31 240 top
SEWTAPLS-2  MINUS  [PETAL-SMALL-2SIDE]  168.91,51.31 240 top
SEWTAPLS-3  MINUS  [PETAL-SMALL-2SIDE]  12.96,105.16 240 top
SEWTAPLS-4  MINUS  [PETAL-SMALL-2SIDE]  90.94,105.16 240 top
SEWTAPLS-5  MINUS  [PETAL-SMALL-2SIDE]  168.91,105.16 240 top
SEWTAPLSOUT  OUT  [PETAL-SMALL-2SIDE]  19.56,39.88 0 top
SEWTAPLSOUT1  OUT  [PETAL-SMALL-2SIDE]  97.54,39.88 0 top
SEWTAPLSOUT2  OUT  [PETAL-SMALL-2SIDE]  175.51,39.88 0 top
SEWTAPLSOUT3  OUT  [PETAL-SMALL-2SIDE]  19.56,93.73 0 top
SEWTAPLSOUT4  OUT  [PETAL-SMALL-2SIDE]  97.54,93.73 0 top
SEWTAPLSOUT5  OUT  [PETAL-SMALL-2SIDE]  175.51,93.73 0 top
SJ1  [PAD-JUMPER-2-NO_NO_SILK]  55.75,25.59 270 bottom
SJ2  [PAD-JUMPER-2-NO_NO_SILK]  133.73,25.59 270 bottom
SJ3  [PAD-JUMPER-2-NO_NO_SILK]  211.71,25.59 270 bottom
SJ4  [PAD-JUMPER-2-NO_NO_SILK]  55.75,79.44 270 bottom
SJ5  [PAD-JUMPER-2-NO_NO_SILK]  133.73,79.44 270 bottom
SJ6  [PAD-JUMPER-2-NO_NO_SILK]  211.71,79.44 270 bottom
ST1  [PETAL-NOHOLE-2SIDE]  19.56,55.12 180 top
ST2  [PETAL-NOHOLE-2SIDE]  12.96,43.69 300 top
ST3  [PETAL-NOHOLE-2SIDE]  26.16,43.69 60 top
ST4  [PETAL-NOHOLE-2SIDE]  104.14,43.69 60 top
ST5  [PETAL-NOHOLE-2SIDE]  90.94,43.69 300 top
ST6  [PETAL-NOHOLE-2SIDE]  97.54,55.12 180 top
ST7  [PETAL-NOHOLE-2SIDE]  182.11,43.69 60 top
ST8  [PETAL-NOHOLE-2SIDE]  168.91,43.69 300 top
ST9  [PETAL-NOHOLE-2SIDE]  175.51,55.12 180 top
ST10  [PETAL-NOHOLE-2SIDE]  26.16,97.54 60 top
ST11  [PETAL-NOHOLE-2SIDE]  12.96,97.54 300 top
ST12  [PETAL-NOHOLE-2SIDE]  19.56,108.97 180 top
ST13  [PETAL-NOHOLE-2SIDE]  104.14,97.54 60 top
ST14  [PETAL-NOHOLE-2SIDE]  90.94,97.54 300 top
ST15  [PETAL-NOHOLE-2SIDE]  97.54,108.97 180 top
ST16  [PETAL-NOHOLE-2SIDE]  182.11,97.54 60 top
ST17  [PETAL-NOHOLE-2SIDE]  168.91,97.54 300 top
ST18  [PETAL-NOHOLE-2SIDE]  175.51,108.97 180 top
U1  SAMD11D14A-M  [QFN-24_ALT2]  46.23,32.26 0 bottom
U2  AP2112K-3.3V  [SOT23-5]  53.53,39.88 0 bottom
U3  ALS-PT19  [ALS-PT19]  19.56,47.5 270 top
U4  AP2112K-3.3V  [SOT23-5]  131.51,39.88 0 bottom
U5  SAMD11D14A-M  [QFN-24_ALT2]  124.21,32.26 0 bottom
U6  ALS-PT19  [ALS-PT19]  97.54,47.5 270 top
U7  AP2112K-3.3V  [SOT23-5]  209.49,39.88 0 bottom
U8  SAMD11D14A-M  [QFN-24_ALT2]  202.18,32.26 0 bottom
U9  ALS-PT19  [ALS-PT19]  175.51,47.5 270 top
U10  AP2112K-3.3V  [SOT23-5]  53.53,93.73 0 bottom
U11  SAMD11D14A-M  [QFN-24_ALT2]  46.23,86.11 0 bottom
U12  ALS-PT19  [ALS-PT19]  19.56,101.35 270 top
U13  AP2112K-3.3V  [SOT23-5]  131.51,93.73 0 bottom
U14  SAMD11D14A-M  [QFN-24_ALT2]  124.21,86.11 0 bottom
U15  ALS-PT19  [ALS-PT19]  97.54,101.35 270 top
U16  AP2112K-3.3V  [SOT23-5]  209.49,93.73 0 bottom
U17  SAMD11D14A-M  [QFN-24_ALT2]  202.18,86.11 0 bottom
U18  ALS-PT19  [ALS-PT19]  175.51,101.35 270 top
U$1  [LOGO-LILYPAD]  46.23,11.14 0 top
U$2  LOGO-LPLP  [LOGO-LILYPAD]  19.56,47.5 0 bottom
U$3  LOGO-LPLP  [LOGO-LILYPAD]  97.54,47.5 0 bottom
U$4  [SFE_LOGO_FLAME_COPPER_EXPOSED_.1]  46.07,54.48 0 bottom
U$5  [LOGO-L]  18.92,18.29 270 bottom
U$6  [LOGO-L]  75.28,34.8 270 bottom
U$7  [LOGO-L]  75.28,24 270 bottom
U$8  [LOGO-L]  75.28,15.75 270 bottom
U$9  [LOGO-L]  75.28,43.05 270 bottom
U$10  [SFE_LOGO_FLAME_COPPER_EXPOSED_.1]  124.05,54.48 0 bottom
U$11  [LOGO-L]  96.9,18.29 270 bottom
U$12  [LOGO-L]  153.26,43.05 270 bottom
U$13  [LOGO-LILYPAD]  124.21,11.14 0 top
U$14  [LOGO-L]  153.26,34.8 270 bottom
U$15  [LOGO-L]  153.26,24 270 bottom
U$16  [LOGO-L]  153.26,15.75 270 bottom
U$17  LOGO-LPLP  [LOGO-LILYPAD]  175.51,47.5 0 bottom
U$18  [SFE_LOGO_FLAME_COPPER_EXPOSED_.1]  202.03,54.48 0 bottom
U$19  [LOGO-L]  174.88,18.29 270 bottom
U$20  [LOGO-L]  231.24,43.05 270 bottom
U$21  [LOGO-LILYPAD]  202.18,11.14 0 top
U$22  [LOGO-L]  231.24,34.8 270 bottom
U$23  [LOGO-L]  231.24,24 270 bottom
U$24  [LOGO-L]  231.24,15.75 270 bottom
U$25  LOGO-LPLP  [LOGO-LILYPAD]  19.56,101.35 0 bottom
U$26  [SFE_LOGO_FLAME_COPPER_EXPOSED_.1]  46.07,108.33 0 bottom
U$27  [LOGO-L]  18.92,72.14 270 bottom
U$28  [LOGO-L]  75.28,96.9 270 bottom
U$29  [LOGO-LILYPAD]  46.23,64.99 0 top
U$30  [LOGO-L]  75.28,88.65 270 bottom
U$31  [LOGO-L]  75.28,77.85 270 bottom
U$32  [LOGO-L]  75.28,69.6 270 bottom
U$33  LOGO-LPLP  [LOGO-LILYPAD]  97.54,101.35 0 bottom
U$34  [SFE_LOGO_FLAME_COPPER_EXPOSED_.1]  124.05,108.33 0 bottom
U$35  [LOGO-L]  96.9,72.14 270 bottom
U$36  [LOGO-L]  153.26,96.9 270 bottom
U$37  [LOGO-LILYPAD]  124.21,64.99 0 top
U$38  [LOGO-L]  153.26,88.65 270 bottom
U$39  [LOGO-L]  153.26,77.85 270 bottom
U$40  [LOGO-L]  153.26,69.6 270 bottom
U$41  LOGO-LPLP  [LOGO-LILYPAD]  175.51,101.35 0 bottom
U$42  [SFE_LOGO_FLAME_COPPER_EXPOSED_.1]  202.03,108.33 0 bottom
U$43  [LOGO-L]  174.88,72.14 270 bottom
U$44  [LOGO-L]  231.24,96.9 270 bottom
U$45  [LOGO-LILYPAD]  202.18,64.99 0 top
U$46  [LOGO-L]  231.24,88.65 270 bottom
U$47  [LOGO-L]  231.24,77.85 270 bottom
U$48  [LOGO-L]  231.24,69.6 270 bottom
Y1  32.768kHz  [CRYSTAL-SMD-3.2X1.5MM]  46.23,27.81 180 bottom
Y2  32.768kHz  [CRYSTAL-SMD-3.2X1.5MM]  124.21,27.81 180 bottom
Y3  32.768kHz  [CRYSTAL-SMD-3.2X1.5MM]  202.18,27.81 180 bottom
Y4  32.768kHz  [CRYSTAL-SMD-3.2X1.5MM]  46.23,81.66 180 bottom
Y5  32.768kHz  [CRYSTAL-SMD-3.2X1.5MM]  124.21,81.66 180 bottom
Y6  32.768kHz  [CRYSTAL-SMD-3.2X1.5MM]  202.18,81.66 180 bottom

## Library data of the parts
$1_61_$_2016-09-25_21-56-01-$1_61_$_2016-09-25_21-56-05 $1_61_$_2016-09-25_21-56-09 E$7 E$8 FD1-FD24 LOGO3 LOGO4 LOGO7 LOGO8 LOGO11 LOGO12 LOGO15 LOGO16 LOGO19 LOGO20 LOGO23 LOGO24 U$4 U$10 U$18 U$26 U$34 U$42 = SparkFun-Aesthetics
BAT1-BAT6 = mike-temp; PROD_ID: BATT-11519
C1 C2 C7 C8 C11 C12 C15 C16 C19 C20 C23 C24 = SparkFun-Capacitors; PROD_ID: CAP-07881
C3-C6 C9 C10 C13 C14 C17 C18 C21 C22 = SparkFun-Capacitors; PROD_ID: CAP-00810
D1 D7 D13 D19 D25 D31 = SparkFun-LED; PROD_ID: DIO-12986
D2 D8 D14 D20 D26 D32 = SparkFun-DiscreteSemi; PROD_ID: DIO-11018
D3-D6 D9-D12 D15-D18 D21-D24 D27-D30 D33-D36 = SparkFun-LED; PROD_ID: DIO-09955
E$1 = SparkFun-Retired
JP1 JP3-JP11 JP14-JP18 JP38-JP45 JP57-JP64 JP76-JP83 JP95-JP102 JP114 LOGO2 LOGO6 LOGO10 LOGO14 LOGO18 LOGO22 U1 U5 U8 U11 U14 U17 = mike-temp
JP2 JP19 JP46 JP65 JP84 JP103 = SparkFun-Connectors
JP12 JP13 JP20-JP37 JP47-JP56 JP66-JP75 JP85-JP94 JP104-JP113 LOGO1 LOGO5 LOGO9 LOGO13 LOGO17 LOGO21 SEWTAP1-SEWTAP24 SEWTAP+ SEWTAP+1-SEWTAP+5 SEWTAP- SEWTAP-1-SEWTAP-5 SEWTAPLS+ SEWTAPLS+1-SEWTAPLS+5 SEWTAPLS- SEWTAPLS-1-SEWTAPLS-5 SEWTAPLSOUT SEWTAPLSOUT1-SEWTAPLSOUT5 ST1-ST18 U$1-U$3 U$5-U$9 U$11-U$17 U$19-U$25 U$27-U$33 U$35-U$41 U$43-U$48 = LilyPad-Wearables
Q1-Q6 = SparkFun-DiscreteSemi; PROD_ID: TRANS-08285
R1 R6 R14 R16 R24 R26 R34 R36 R44 R46 R54 R56 = SparkFun-Resistors; PROD_ID: RES-00824
R2 R5 R11 R15 R21 R25 R31 R35 R41 R45 R51 R55 = SparkFun-Resistors; PROD_ID: RES-00818
R3 R12 R22 R32 R42 R52 = SparkFun-Resistors; PROD_ID: RES-08296
R4 R13 R23 R33 R43 R53 = SparkFun-Resistors; PROD_ID: RES-07856
R7-R10 R17-R20 R27-R30 R37-R40 R47-R50 R57-R60 = SparkFun-Resistors
S1 S3 S5 S7 S9 S11 = SparkFun-Electromechanical; PROD_ID: SWCH-13065
S2 S4 S6 S8 S10 S12 = SparkFun-Electromechanical; PROD_ID: SWCH-08247
SJ1-SJ6 = SparkFun-Passives
U2 U4 U7 U10 U13 U16 = SparkFun-PowerIC; PROD_ID: VREG-12457
U3 U6 U9 U12 U15 U18 = SparkFun-Sensors; PROD_ID: IC-11836
Y1-Y6 = SparkFun-FreqCtrl; PROD_ID: XTAL-13062

## Nets
!BLUE!/SWDIO: JP7.P$1 R2.1 U1.20
!BLUE!/SWDIO1: JP17.P$1 R11.1 U5.20
!BLUE!/SWDIO2: JP44.P$1 R21.1 U8.20
!BLUE!/SWDIO3: JP63.P$1 R31.1 U11.20
!BLUE!/SWDIO4: JP82.P$1 R41.1 U14.20
!BLUE!/SWDIO5: JP101.P$1 R51.1 U17.20
!GREEN!: R3.1 U1.17
!GREEN!1: R12.1 U5.17
!GREEN!2: R22.1 U8.17
!GREEN!3: R32.1 U11.17
!GREEN!4: R42.1 U14.17
!GREEN!5: R52.1 U17.17
!RED!/SWDCLK: JP3.P$1 R4.1 U1.19
!RED!/SWDCLK1: JP11.P$1 R13.1 U5.19
!RED!/SWDCLK2: JP40.P$1 R23.1 U8.19
!RED!/SWDCLK3: JP59.P$1 R33.1 U11.19
!RED!/SWDCLK4: JP78.P$1 R43.1 U14.19
!RED!/SWDCLK5: JP97.P$1 R53.1 U17.19
!RST!: JP8.P$1 R5.2 SJ1.2
!RST!1: C3.1 R5.1 U1.18
!RST!2: JP18.P$1 R15.2 SJ2.2
!RST!3: C6.1 R15.1 U5.18
!RST!4: JP45.P$1 R25.2 SJ3.2
!RST!5: C10.1 R25.1 U8.18
!RST!6: JP64.P$1 R35.2 SJ4.2
!RST!7: C14.1 R35.1 U11.18
!RST!8: JP83.P$1 R45.2 SJ5.2
!RST!9: C18.1 R45.1 U14.18
!RST!10: JP102.P$1 R55.2 SJ6.2
!RST!11: C22.1 R55.1 U17.18
B: D1.3 R2.2
B1: D7.3 R11.2
B2: D13.3 R21.2
B3: D19.3 R31.2
B4: D25.3 R41.2
B5: D31.3 R51.2
BATT3V: BAT1.+1 BAT1.+2 JP9.P$1 Q1.3
BATT3V1: BAT2.+1 BAT2.+2 JP38.P$1 Q2.3
BATT3V2: BAT3.+1 BAT3.+2 JP57.P$1 Q3.3
BATT3V3: BAT4.+1 BAT4.+2 JP76.P$1 Q4.3
BATT3V4: BAT5.+1 BAT5.+2 JP95.P$1 Q5.3
BATT3V5: BAT6.+1 BAT6.+2 JP114.P$1 Q6.3
BUTTON: S1.1 S1.2 SJ1.1 U1.4
BUTTON1: S3.1 S3.2 SJ2.1 U5.4
BUTTON2: S5.1 S5.2 SJ3.1 U8.4
BUTTON3: S7.1 S7.2 SJ4.1 U11.4
BUTTON4: S9.1 S9.2 SJ5.1 U14.4
BUTTON5: S11.1 S11.2 SJ6.1 U17.4
G: D1.2 R3.2
G1: D7.2 R12.2
G2: D13.2 R22.2
G3: D19.2 R32.2
G4: D25.2 R42.2
G5: D31.2 R52.2
GND: BAT1.-3 C1.1 C2.1 C3.2 C4.2 JP1.GND JP4.P$1 JP13.1 JP21.1 JP23.1 JP25.1 JP27.1 R1.1 R6.1 R7.1 R8.1 R9.1 R10.1 S1.3 S1.4 S2.3 S2.4 SEWTAP-.1 SEWTAPLS-.1 U1.23 U2.2
GND1: BAT2.-3 C5.2 C6.2 C7.1 C8.1 JP10.GND JP14.P$1 JP28.1 JP29.1 JP30.1 JP31.1 JP32.1 R14.1 R16.1 R17.1 R18.1 R19.1 R20.1 S3.3 S3.4 S4.3 S4.4 SEWTAP-1.1 SEWTAPLS-1.1 U4.2 U5.23
GND3: BAT3.-3 C9.2 C10.2 C11.1 C12.1 JP39.GND JP41.P$1 JP47.1 JP48.1 JP49.1 JP50.1 JP51.1 R24.1 R26.1 R27.1 R28.1 R29.1 R30.1 S5.3 S5.4 S6.3 S6.4 SEWTAP-2.1 SEWTAPLS-2.1 U7.2 U8.23
GND6: BAT4.-3 C13.2 C14.2 C15.1 C16.1 JP58.GND JP60.P$1 JP66.1 JP67.1 JP68.1 JP69.1 JP70.1 R34.1 R36.1 R37.1 R38.1 R39.1 R40.1 S7.3 S7.4 S8.3 S8.4 SEWTAP-3.1 SEWTAPLS-3.1 U10.2 U11.23
GND8: BAT5.-3 C17.2 C18.2 C19.1 C20.1 JP77.GND JP79.P$1 JP85.1 JP86.1 JP87.1 JP88.1 JP89.1 R44.1 R46.1 R47.1 R48.1 R49.1 R50.1 S9.3 S9.4 S10.3 S10.4 SEWTAP-4.1 SEWTAPLS-4.1 U13.2 U14.23
GND10: BAT6.-3 C21.2 C22.2 C23.1 C24.1 JP96.GND JP98.P$1 JP104.1 JP105.1 JP106.1 JP107.1 JP108.1 R54.1 R56.1 R57.1 R58.1 R59.1 R60.1 S11.3 S11.4 S12.3 S12.4 SEWTAP-5.1 SEWTAPLS-5.1 U16.2 U17.23
N$1: D2.A U2.5
N$2: D3.C R7.2
N$3: D4.C R8.2
N$4: D5.C R9.2
N$5: D6.C R10.2
N$25: D8.A U4.5
N$26: D9.C R17.2
N$27: D10.C R18.2
N$28: D11.C R19.2
N$29: D12.C R20.2
N$49: D14.A U7.5
N$50: D15.C R27.2
N$51: D16.C R28.2
N$52: D17.C R29.2
N$53: D18.C R30.2
N$73: D20.A U10.5
N$74: D21.C R37.2
N$75: D22.C R38.2
N$76: D23.C R39.2
N$77: D24.C R40.2
N$97: D26.A U13.5
N$98: D27.C R47.2
N$99: D28.C R48.2
N$100: D29.C R49.2
N$101: D30.C R50.2
N$121: D32.A U16.5
N$122: D33.C R57.2
N$123: D34.C R58.2
N$124: D35.C R59.2
N$125: D36.C R60.2
R: D1.1 R4.2
R1: D7.1 R13.2
R2: D13.1 R23.2
R3: D19.1 R33.2
R4: D25.1 R43.2
R5: D31.1 R53.2
SEWTAP1: R6.2 SEWTAP1.1 SEWTAPLSOUT.1 U1.11 U3.E
SEWTAP2: JP12.1 S2.1 S2.2 SEWTAP2.1 U1.12
SEWTAP3: D3.A D4.A JP20.1 JP22.1 SEWTAP3.1 U1.6
SEWTAP4: D5.A D6.A JP24.1 JP26.1 SEWTAP4.1 U1.5
SEWTAP9: R16.2 SEWTAP5.1 SEWTAPLSOUT1.1 U5.11 U6.E
SEWTAP10: JP33.1 S4.1 S4.2 SEWTAP6.1 U5.12
SEWTAP11: D11.A D12.A JP36.1 JP37.1 SEWTAP8.1 U5.5
SEWTAP12: D9.A D10.A JP34.1 JP35.1 SEWTAP7.1 U5.6
SEWTAP17: R26.2 SEWTAP9.1 SEWTAPLSOUT2.1 U8.11 U9.E
SEWTAP18: JP52.1 S6.1 S6.2 SEWTAP10.1 U8.12
SEWTAP19: D17.A D18.A JP55.1 JP56.1 SEWTAP12.1 U8.5
SEWTAP20: D15.A D16.A JP53.1 JP54.1 SEWTAP11.1 U8.6
SEWTAP25: R36.2 SEWTAP13.1 SEWTAPLSOUT3.1 U11.11 U12.E
SEWTAP26: JP71.1 S8.1 S8.2 SEWTAP14.1 U11.12
SEWTAP27: D23.A D24.A JP74.1 JP75.1 SEWTAP16.1 U11.5
SEWTAP28: D21.A D22.A JP72.1 JP73.1 SEWTAP15.1 U11.6
SEWTAP33: R46.2 SEWTAP17.1 SEWTAPLSOUT4.1 U14.11 U15.E
SEWTAP34: JP90.1 S10.1 S10.2 SEWTAP18.1 U14.12
SEWTAP35: D29.A D30.A JP93.1 JP94.1 SEWTAP20.1 U14.5
SEWTAP36: D27.A D28.A JP91.1 JP92.1 SEWTAP19.1 U14.6
SEWTAP41: R56.2 SEWTAP21.1 SEWTAPLSOUT5.1 U17.11 U18.E
SEWTAP42: JP109.1 S12.1 S12.2 SEWTAP22.1 U17.12
SEWTAP43: D35.A D36.A JP112.1 JP113.1 SEWTAP24.1 U17.5
SEWTAP44: D33.A D34.A JP110.1 JP111.1 SEWTAP23.1 U17.6
SEWTAP+: SEWTAP+.1 SEWTAPLS+.1 U1.1 U3.C
SEWTAP+2: SEWTAP+1.1 SEWTAPLS+1.1 U5.1 U6.C
SEWTAP+4: SEWTAP+2.1 SEWTAPLS+2.1 U8.1 U9.C
SEWTAP+6: SEWTAP+3.1 SEWTAPLS+3.1 U11.1 U12.C
SEWTAP+8: SEWTAP+4.1 SEWTAPLS+4.1 U14.1 U15.C
SEWTAP+10: SEWTAP+5.1 SEWTAPLS+5.1 U17.1 U18.C
USB5V: JP1.VBUS JP2.1 Q1.1 R1.2 U2.1 U2.3
USB5V1: JP10.VBUS JP19.1 Q2.1 R14.2 U4.1 U4.3
USB5V2: JP39.VBUS JP46.1 Q3.1 R24.2 U7.1 U7.3
USB5V3: JP58.VBUS JP65.1 Q4.1 R34.2 U10.1 U10.3
USB5V4: JP77.VBUS JP84.1 Q5.1 R44.2 U13.1 U13.3
USB5V5: JP96.VBUS JP103.1 Q6.1 R54.2 U16.1 U16.3
USB_N [USB]: JP1.D- U1.21
USB_N1 [USB]: JP10.D- U5.21
USB_N2 [USB]: JP39.D- U8.21
USB_N3 [USB]: JP58.D- U11.21
USB_N4 [USB]: JP77.D- U14.21
USB_N5 [USB]: JP96.D- U17.21
USB_P [USB]: JP1.D+ U1.22
USB_P1 [USB]: JP10.D+ U5.22
USB_P2 [USB]: JP39.D+ U8.22
USB_P3 [USB]: JP58.D+ U11.22
USB_P4 [USB]: JP77.D+ U14.22
USB_P5 [USB]: JP96.D+ U17.22
VDD: C4.1 D1.4 D2.C JP6.P$1 Q1.2 U1.24
VDD1: C5.1 D7.4 D8.C JP16.P$1 Q2.2 U5.24
VDD2: C9.1 D13.4 D14.C JP43.P$1 Q3.2 U8.24
VDD3: C13.1 D19.4 D20.C JP62.P$1 Q4.2 U11.24
VDD4: C17.1 D25.4 D26.C JP81.P$1 Q5.2 U14.24
VDD5: C21.1 D31.4 D32.C JP100.P$1 Q6.2 U17.24
X1: C1.2 U1.7 Y1.P$2
X2: C2.2 U1.8 Y1.P$1
X3: C8.2 U5.8 Y2.P$1
X4: C7.2 U5.7 Y2.P$2
X5: C12.2 U8.8 Y3.P$1
X6: C11.2 U8.7 Y3.P$2
X7: C16.2 U11.8 Y4.P$1
X8: C15.2 U11.7 Y4.P$2
X9: C20.2 U14.8 Y5.P$1
X10: C19.2 U14.7 Y5.P$2
X11: C24.2 U17.8 Y6.P$1
X12: C23.2 U17.7 Y6.P$2

## Tracks (layer width: path | path; a pad name or v marks a point on that pad's centre or on a via)
!BLUE!/SWDIO
  Bottom 0.305: R2.1 40.83,27.81 41.15,28.13 41.15,30.67 40.2,31.62 JP7.P$1 44.96,35.43 45.48,34.91 U1.20
!BLUE!/SWDIO1
  Bottom 0.305: R11.1 118.81,27.81 119.13,28.13 119.13,30.67 118.17,31.62 JP17.P$1 122.94,35.43 123.46,34.91 U5.20
!BLUE!/SWDIO2
  Bottom 0.305: R21.1 196.79,27.81 197.1,28.13 197.1,30.67 196.15,31.62 JP44.P$1 200.91,35.43 201.43,34.91 U8.20
!BLUE!/SWDIO3
  Bottom 0.305: R31.1 40.83,81.66 41.15,81.98 41.15,84.52 40.2,85.47 JP63.P$1 44.96,89.28 45.48,88.76 U11.20
!BLUE!/SWDIO4
  Bottom 0.305: R41.1 118.81,81.66 119.13,81.98 119.13,84.52 118.17,85.47 JP82.P$1 122.94,89.28 123.46,88.76 U14.20
!BLUE!/SWDIO5
  Bottom 0.305: R51.1 196.79,81.66 197.1,81.98 197.1,84.52 196.15,85.47 JP101.P$1 200.91,89.28 201.43,88.76 U17.20
!GREEN!
  Bottom 0.305: U1.17 42.85,33.01 42.42,32.58 42.42,26.23 41.47,25.27 R3.1
!GREEN!1
  Bottom 0.305: U5.17 120.83,33.01 120.4,32.58 120.4,26.23 119.44,25.27 R12.1
!GREEN!2
  Bottom 0.305: U8.17 198.81,33.01 198.37,32.58 198.37,26.23 197.42,25.27 R22.1
!GREEN!3
  Bottom 0.305: U11.17 42.85,86.86 42.42,86.42 42.42,80.07 41.47,79.12 R32.1
!GREEN!4
  Bottom 0.305: U14.17 120.83,86.86 120.4,86.42 120.4,80.07 119.44,79.12 R42.1
!GREEN!5
  Bottom 0.305: U17.17 198.81,86.86 198.37,86.42 198.37,80.07 197.42,79.12 R52.1
!RED!/SWDCLK  (via drill 0.51)
  Top 0.305: JP3.P$1 41.4,39.31 41.4,34.56 v41.15,34.31
  Bottom 0.305: R4.1 41.15,26.54 41.78,27.18 41.78,32.58 41.15,33.21 v41.15,34.31 U1.19
!RED!/SWDCLK1  (via drill 0.51)
  Top 0.305: JP11.P$1 119.38,39.31 119.38,34.56 v119.13,34.31
  Bottom 0.305: R13.1 119.13,26.54 119.76,27.18 119.76,32.58 119.13,33.21 v119.13,34.31 U5.19
!RED!/SWDCLK2  (via drill 0.51)
  Top 0.305: JP40.P$1 197.36,39.31 197.36,34.56 v197.1,34.31
  Bottom 0.305: R23.1 197.1,26.54 197.74,27.18 197.74,32.58 197.1,33.21 v197.1,34.31 U8.19
!RED!/SWDCLK3  (via drill 0.51)
  Top 0.305: JP59.P$1 41.4,93.15 41.4,88.41 v41.15,88.16
  Bottom 0.305: R33.1 41.15,80.39 41.78,81.03 41.78,86.42 41.15,87.06 v41.15,88.16 U11.19
!RED!/SWDCLK4  (via drill 0.51)
  Top 0.305: JP78.P$1 119.38,93.15 119.38,88.41 v119.13,88.16
  Bottom 0.305: R43.1 119.13,80.39 119.76,81.03 119.76,86.42 119.13,87.06 v119.13,88.16 U14.19
!RED!/SWDCLK5  (via drill 0.51)
  Top 0.305: JP97.P$1 197.36,93.15 197.36,88.41 v197.1,88.16
  Bottom 0.305: R53.1 197.1,80.39 197.74,81.03 197.74,86.42 197.1,87.06 v197.1,88.16 U17.19
!RST!  (via drill 0.51)
  Top 0.305: v50.67,22.73 44.96,22.73 37.66,30.04 JP8.P$1
  Bottom 0.305: 54.06,25.46 R5.2 55.75,25.27 SJ1.2 55.75,24 54.48,22.73 v50.67,22.73
!RST!1  (via drill 0.51)
  Top 0.305: v42.1,33.51 42.1,30.04 45.59,26.54 v50.67,26.54
  Bottom 0.305: U1.18 v42.1,33.51 | C3.1 v50.67,26.54 50.67,25.75 51.15,25.27 R5.1
!RST!2  (via drill 0.51)
  Top 0.305: v128.65,22.73 122.94,22.73 115.63,30.04 JP18.P$1
  Bottom 0.305: 132.04,25.46 R15.2 133.73,25.27 SJ2.2 133.73,24 132.46,22.73 v128.65,22.73
!RST!3  (via drill 0.51)
  Top 0.305: v120.08,33.51 120.08,30.04 123.57,26.54 v128.65,26.54
  Bottom 0.305: U5.18 v120.08,33.51 | C6.1 v128.65,26.54 128.65,25.75 129.13,25.27 R15.1
!RST!4  (via drill 0.51)
  Top 0.305: v206.63,22.73 200.91,22.73 193.61,30.04 JP45.P$1
  Bottom 0.305: 210.02,25.46 R25.2 211.71,25.27 SJ3.2 211.71,24 210.44,22.73 v206.63,22.73
!RST!5  (via drill 0.51)
  Top 0.305: v198.06,33.51 198.06,30.04 201.55,26.54 v206.63,26.54
  Bottom 0.305: U8.18 v198.06,33.51 | C10.1 v206.63,26.54 206.63,25.75 207.1,25.27 R25.1
!RST!6  (via drill 0.51)
  Top 0.305: v50.67,76.58 44.96,76.58 37.66,83.88 JP64.P$1
  Bottom 0.305: 54.06,79.31 R35.2 55.75,79.12 SJ4.2 55.75,77.85 54.48,76.58 v50.67,76.58
!RST!7  (via drill 0.51)
  Top 0.305: v42.1,87.36 42.1,83.88 45.59,80.39 v50.67,80.39
  Bottom 0.305: U11.18 v42.1,87.36 | C14.1 v50.67,80.39 50.67,79.6 51.15,79.12 R35.1
!RST!8  (via drill 0.51)
  Top 0.305: v128.65,76.58 122.94,76.58 115.63,83.88 JP83.P$1
  Bottom 0.305: 132.04,79.31 R45.2 133.73,79.12 SJ5.2 133.73,77.85 132.46,76.58 v128.65,76.58
!RST!9  (via drill 0.51)
  Top 0.305: v120.08,87.36 120.08,83.88 123.57,80.39 v128.65,80.39
  Bottom 0.305: U14.18 v120.08,87.36 | C18.1 v128.65,80.39 128.65,79.6 129.13,79.12 R45.1
!RST!10  (via drill 0.51)
  Top 0.305: v206.63,76.58 200.91,76.58 193.61,83.88 JP102.P$1
  Bottom 0.305: 210.02,79.31 R55.2 211.71,79.12 SJ6.2 211.71,77.85 210.44,76.58 v206.63,76.58
!RST!11  (via drill 0.51)
  Top 0.305: v198.06,87.36 198.06,83.88 201.55,80.39 v206.63,80.39
  Bottom 0.305: U17.18 v198.06,87.36 | C22.1 v206.63,80.39 206.63,79.6 207.1,79.12 R55.1
B  (via drill 0.51)
  Top 0.406: D1.3 v35.43,27.81
  Bottom 0.305: R2.2 v35.43,27.81
B1  (via drill 0.51)
  Top 0.406: D7.3 v113.41,27.81
  Bottom 0.305: R11.2 v113.41,27.81
B2  (via drill 0.51)
  Top 0.406: D13.3 v191.39,27.81
  Bottom 0.305: R21.2 v191.39,27.81
B3  (via drill 0.51)
  Top 0.406: D19.3 v35.43,81.66
  Bottom 0.305: R31.2 v35.43,81.66
B4  (via drill 0.51)
  Top 0.406: D25.3 v113.41,81.66
  Bottom 0.305: R41.2 v113.41,81.66
B5  (via drill 0.51)
  Top 0.406: D31.3 v191.39,81.66
  Bottom 0.305: R51.2 v191.39,81.66
BATT3V  (via drill 0.51)  (1 unrouted)
  Top 0.406: v53.53,33.54 54.81,33.54 BAT1.+1
  Bottom 0.406: v53.53,33.54 Q1.3
  Bottom 0.457: JP9.P$1 56.78,35.51 BAT1.+1
BATT3V1  (via drill 0.51)  (1 unrouted)
  Top 0.406: v131.51,33.54 132.79,33.54 BAT2.+1
  Bottom 0.406: v131.51,33.54 Q2.3
  Bottom 0.457: JP38.P$1 134.76,35.51 BAT2.+1
BATT3V2  (via drill 0.51)  (1 unrouted)
  Top 0.406: v209.49,33.54 210.77,33.54 BAT3.+1
  Bottom 0.406: v209.49,33.54 Q3.3
  Bottom 0.457: JP57.P$1 212.74,35.51 BAT3.+1
BATT3V3  (via drill 0.51)  (1 unrouted)
  Top 0.406: v53.53,87.39 54.81,87.39 BAT4.+1
  Bottom 0.406: v53.53,87.39 Q4.3
  Bottom 0.457: JP76.P$1 56.78,89.36 BAT4.+1
BATT3V4  (via drill 0.51)  (1 unrouted)
  Top 0.406: v131.51,87.39 132.79,87.39 BAT5.+1
  Bottom 0.406: v131.51,87.39 Q5.3
  Bottom 0.457: JP95.P$1 134.76,89.36 BAT5.+1
BATT3V5  (via drill 0.51)  (1 unrouted)
  Top 0.406: v209.49,87.39 210.77,87.39 BAT6.+1
  Bottom 0.406: v209.49,87.39 Q6.3
  Bottom 0.457: JP114.P$1 212.74,89.36 BAT6.+1
BUTTON  (via drill 0.51)
  Top 0.406: v55.59,29.72 v55.59,26.86 60.28,24.24 | 60.28,24.24 S1.1 | 60.28,24.24 S1.2
  Bottom 0.305: v55.59,29.72 53.21,29.72 50.92,32.01 U1.4 | v55.59,26.86 55.59,26.04 SJ1.1
BUTTON1  (via drill 0.51)
  Top 0.406: v133.57,29.72 v133.57,26.86 138.25,24.24 | 138.25,24.24 S3.1 | 138.25,24.24 S3.2
  Bottom 0.305: v133.57,29.72 131.19,29.72 128.9,32.01 U5.4 | v133.57,26.86 133.57,26.04 SJ2.1
BUTTON2  (via drill 0.51)
  Top 0.406: v211.55,29.72 v211.55,26.86 216.23,24.24 | 216.23,24.24 S5.1 | 216.23,24.24 S5.2
  Bottom 0.305: v211.55,29.72 209.17,29.72 206.88,32.01 U8.4 | v211.55,26.86 211.55,26.04 SJ3.1
BUTTON3  (via drill 0.51)
  Top 0.406: v55.59,83.57 v55.59,80.71 60.28,78.09 | 60.28,78.09 S7.1 | 60.28,78.09 S7.2
  Bottom 0.305: v55.59,83.57 53.21,83.57 50.92,85.86 U11.4 | v55.59,80.71 55.59,79.89 SJ4.1
BUTTON4  (via drill 0.51)
  Top 0.406: v133.57,83.57 v133.57,80.71 138.25,78.09 | 138.25,78.09 S9.1 | 138.25,78.09 S9.2
  Bottom 0.305: v133.57,83.57 131.19,83.57 128.9,85.86 U14.4 | v133.57,80.71 133.57,79.89 SJ5.1
BUTTON5  (via drill 0.51)
  Top 0.406: v211.55,83.57 v211.55,80.71 216.23,78.09 | 216.23,78.09 S11.1 | 216.23,78.09 S11.2
  Bottom 0.305: v211.55,83.57 209.17,83.57 206.88,85.86 U17.4 | v211.55,80.71 211.55,79.89 SJ6.1
G  (via drill 0.51)
  Top 0.406: D1.2 v36.7,24.64
  Bottom 0.305: R3.2 37.34,25.27 v36.7,24.64
G1  (via drill 0.51)
  Top 0.406: D7.2 v114.68,24.64
  Bottom 0.305: R12.2 115.32,25.27 v114.68,24.64
G2  (via drill 0.51)
  Top 0.406: D13.2 v192.66,24.64
  Bottom 0.305: R22.2 193.29,25.27 v192.66,24.64
G3  (via drill 0.51)
  Top 0.406: D19.2 v36.7,78.49
  Bottom 0.305: R32.2 37.34,79.12 v36.7,78.49
G4  (via drill 0.51)
  Top 0.406: D25.2 v114.68,78.49
  Bottom 0.305: R42.2 115.32,79.12 v114.68,78.49
G5  (via drill 0.51)
  Top 0.406: D31.2 v192.66,78.49
  Bottom 0.305: R52.2 193.29,79.12 v192.66,78.49
GND  (via drill 0.51)
  Top 0.305: 55.11,47.63 55.29,47.95